# Altium PCB 5th Year Project.PcbDoc
Units mm, origin at the board's own origin, x right, y up, seen from the top; angles counter-clockwise.
Board outline 69.4 x 66.55 mm, 2 copper layers (Top Layer, Bottom Layer), stack 0.273 mm thick; 40 components, 34 nets, 233 pads, 70 vias.
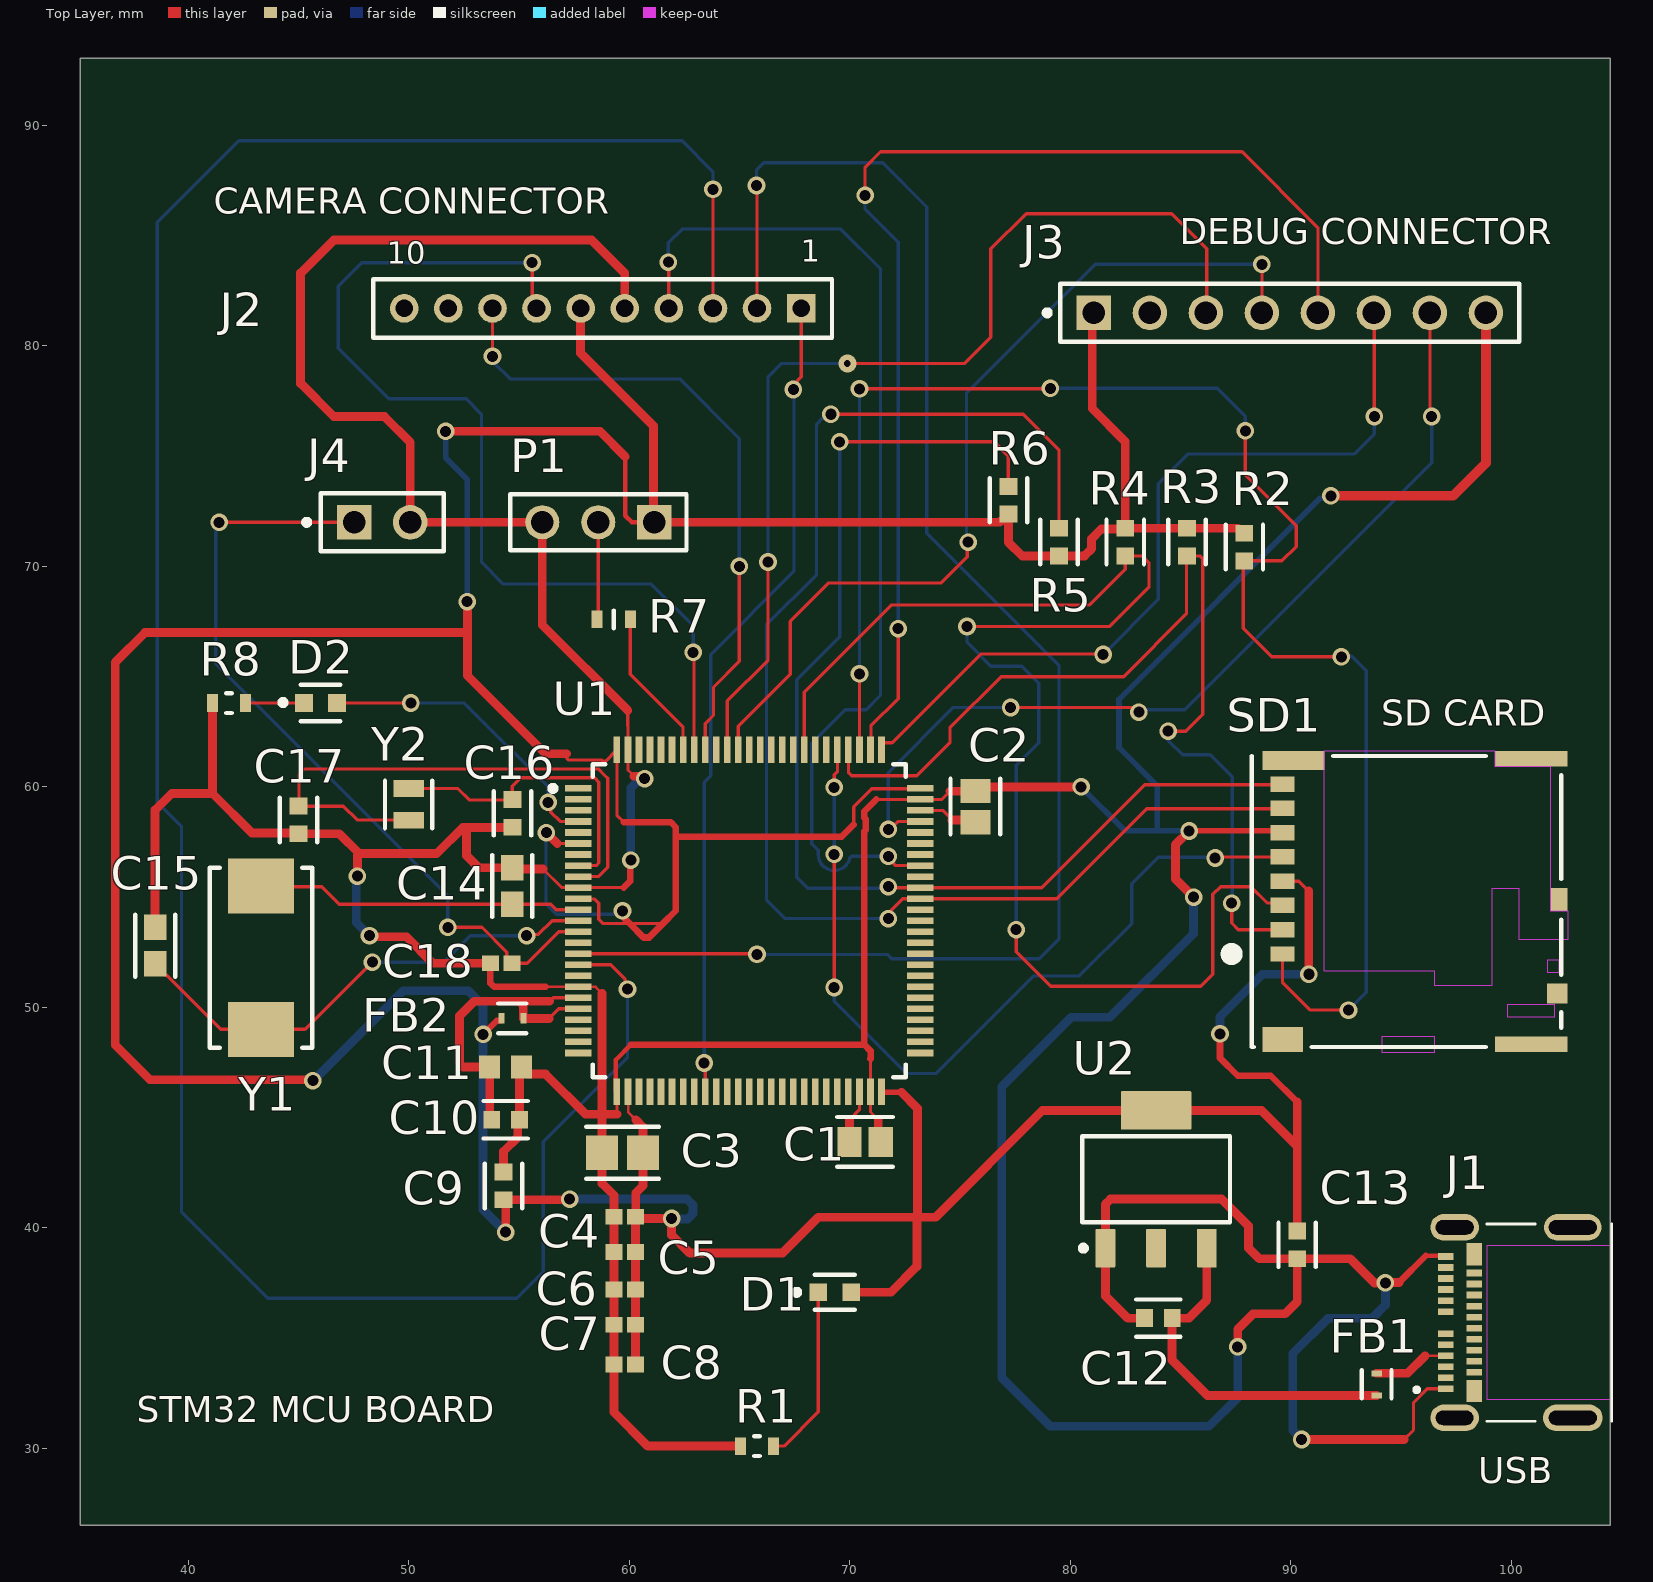
[diagram p0: Top Layer view]
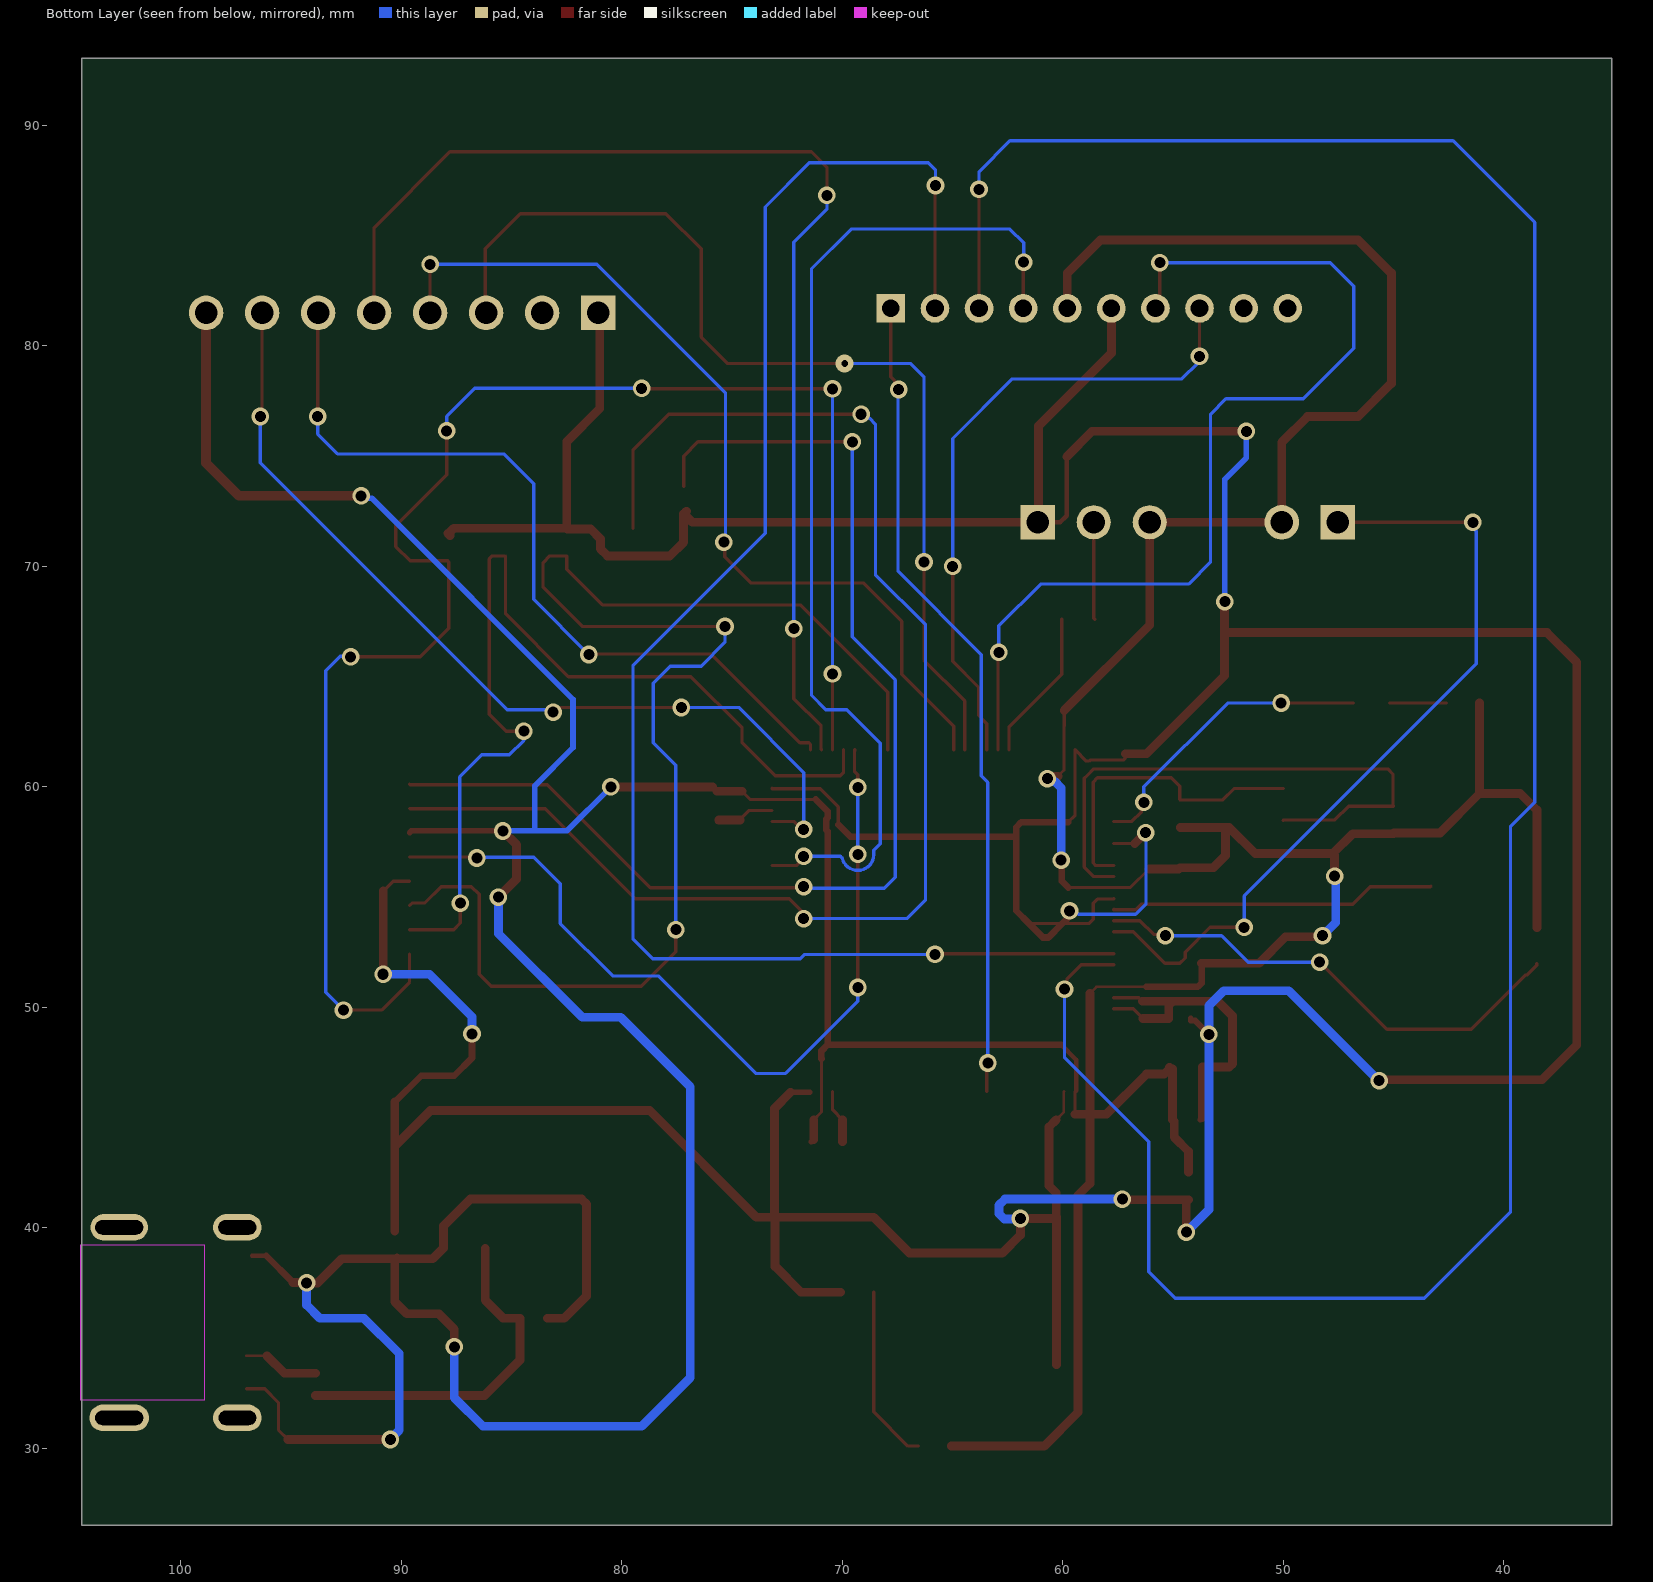
[diagram p1: Bottom Layer view, seen from below]
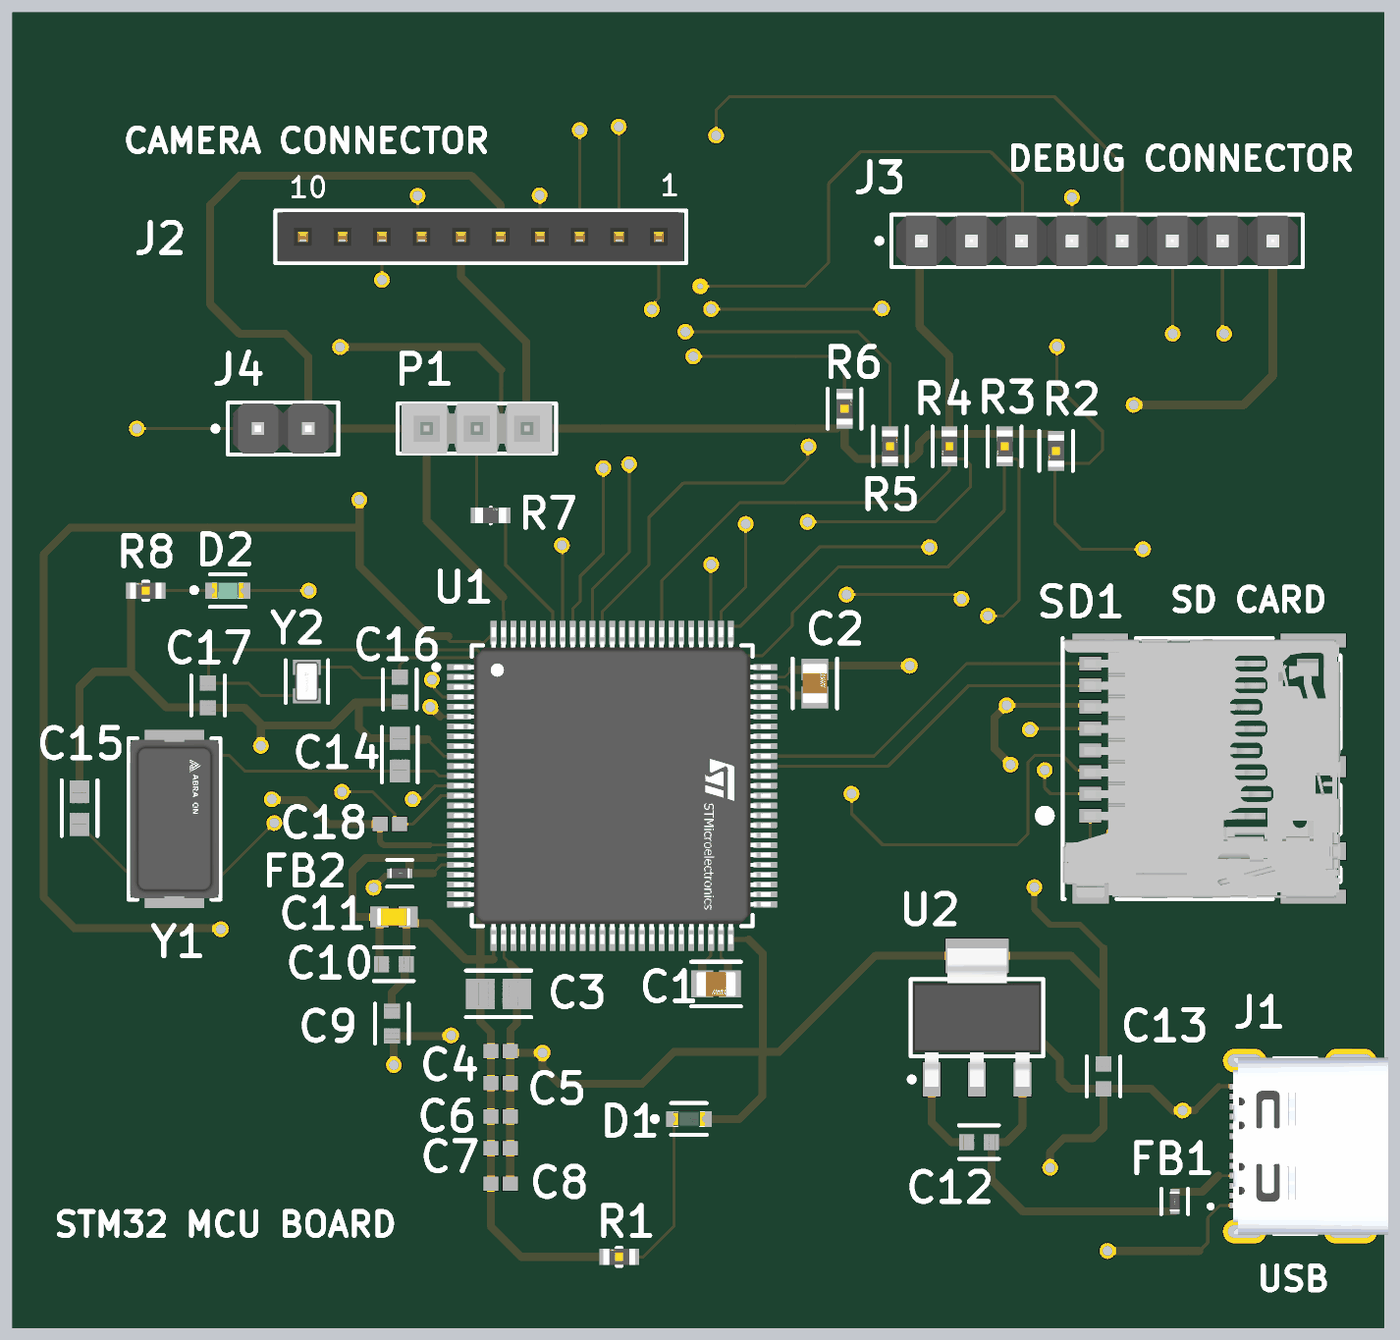
[diagram p2: 3D render of the assembled board from above, using the file's embedded part models]

## Layer stack, top to bottom
Top Solder: solder mask 0.0254, SM-001, Dk 4
Top Layer: signal copper 0.035
Dielectric 1: core 0.2032, Core-024, Dk 4.6
Bottom Layer: signal copper 0.035
Bottom Solder: solder mask 0.0254, SM-001, Dk 4

## Board outline
35.1,26.5 104.5,26.5 104.5,93.05 35.1,93.05

## Design rules (kind name [scope] priority, off if disabled: settings)
Clearance [All] p1: gap=0.254 ignorepadtopadclearanceinfootprint=FALSE except(0: Arc-Hole Track-Hole SMDPad-Hole THPad-Hole Via-Hole Fill-Hole Poly-Hole Region-Hole Text-Hole; 0.127: SMDPad-SMDPad; 0.33: Arc-THPad Track-THPad; 0.5: THPad-THPad)
HoleSize [All] p1: absolutevalues=TRUE maxlimit=6.3 minlimit=0.2 maxpercent=80.000 minpercent=20.000
HoleToHoleClearance [All] p1: gap=0.5 allowstackedmicrovias=TRUE
MinimumAnnularRing [All] p1: minimumring=0.13
MinimumSolderMaskSliver [All] p1: minsoldermaskwidth=0.2
PolygonConnect [All] p1: connectstyle=Relief reliefconductorwidth=0.254 reliefentries=4 polygonreliefangle="90 Angle" airgapwidth=0.254
RoutingVias [All] p1: holewidth=0.5 width=1 viastyle="Through Hole" minholewidth=0.3 minwidth=0.5 maxholewidth=2 maxwidth=3
SilkToSolderMaskClearance [IsPad] p1: minsilkscreentomaskgap=0.2 clearancetoexposedcopper=TRUE
SolderMaskExpansion [All] p1: expansion=0.05 istentingtop=FALSE
Width [All] p1: maxlimit=0.5 minlimit=0.127 preferedwidth=0.3
26 further rules are at their usual default settings.

## Classes and differential pairs
component class "OTHER PARTS": J2 J3 J4 P1 R2 R3 R4 R5 R6 R7 SD1
component class MCU: C1 C2 C3 C4 C5 C6 C7 C8 C9 C10 C11 C12 C13 C14 C15 C16 C17 C18 D1 D2 FB1 FB2 J1 R1 R8 U1 U2 Y1 Y2

## Components (designator, comment, footprint, x,y, rotation, side; value= is the part's Value field where it differs from the comment)
C1 "2.2uF" FP-0805-L_2_01_0_2-W_1_25-IPC_C 70.7,43.9 r0 top
C2 "2.2uF" FP-0805-L_2_01_0_2-W_1_25-IPC_C 75.7,59.106 r90 top
C3 "4.7uF" FP-CL21-IPC_A 59.7,43.4 r180 top
C4 "100nF" CAPC1050X55X23ML05T13 59.8,40.5 r0 top
C5 "100nF" CAPC1050X55X23ML05T13 59.8,38.9 r0 top
C6 "100nF" CAPC1050X55X23ML05T13 59.8,37.2 r0 top
C7 "100nF" CAPC1050X55X23ML05T13 59.8,35.6 r0 top
C8 "100nF" CAPC1050X55X23ML05T13 59.8,33.8 r0 top
C9 "1uF" FP-CL10-IPC_C 54.3,41.9 r90 top
C10 "1uF" FP-CL10-IPC_C 54.4,44.9 r0 top
C11 "10nF" CAPC1608X90X35ML10T15 54.4,47.3 r180 top
C12 "1uF" FP-CL10-IPC_C 84,35.9 r180 top
C13 "1uF" FP-CL10-IPC_C 90.3,39.227 r270 top
C14 "18pF" FP-CL10-IPC_A 54.7,55.502 r90 top
C15 "18pF" FP-CL10-IPC_A 38.5,52.8 r90 top
C16 "4.7pF" FP-CL10-IPC_C 54.7,58.8 r270 top
C17 "4.7pF" FP-CL10-IPC_C 45,58.5 r270 top
C18 "100nF" CAPC1050X55X23ML05T13 54.2,52 r0 top
D1 "PWRON" FP-6_541-5092_01-4-MFG 69.325,37.075 r0 top
D2 "Debug LED" FP-6_541-5094_01-4-MFG 46,63.8 r0 top
FB1 "MMZ1005D121CTD25" FP-MMZ1005-IPC_C 93.9,32.9 r90 top
FB2 "MMZ1005D121CTD25" FP-MMZ1005-IPC_C 54.7,49.5 r0 top
J1 "105450-0101" MOLEX_105450-0101 100.8,35.7 r90 top
J2 "62001011821" 62001011821 58.8,81.7 r180 top
J3 "M20-9990846" FP-M20-9990846-MFG 89.97,81.5 r0 top
J4 "M20-9990246" FP-M20-9990246-MFG 48.8,72 r0 top
P1 "TSW-103-07-T-S" SMTC-TSW-103-07-X-S 61.14,72 r180 top
R1 "330R" FP-KTR03-MFG 65.8,30.1 r180 top
R2 "47k" FP-KTR03-IPC_C 87.9,70.873 r270 top
R3 "47k" FP-KTR03-IPC_C 85.3,71.1 r270 top
R4 "47k" FP-KTR03-IPC_C 82.5,71.1 r270 top
R5 "47k" FP-KTR03-IPC_C 79.5,71.1 r90 top
R6 "47k" FP-KTR03-IPC_C 77.2,73 r90 top
R7 "10k" FP-SFR03-MFG 59.3,67.6 r0 top
R8 "330R" FP-KTR03-MFG 41.85,63.8 r180 top
SD1 "503398-1892" MOLX-503398-1892_V 95.9,54.8 r90 top
U1 "STM32H743VIT6" FP-LQFP100-1L-MFG 65.445,53.93 r0 top
U2 "TLV1117LV33DCYR" DCY0004A_N 83.9,42.2 r90 top
Y1 "ABM2-25.000MHZ-D4Y-T" FP-ABM2-MFG 43.3,52.25 r270 top
Y2 "ABS06-107-32.768KHZ-T" FP-ABS06-MFG 50,59.2 r270 top

## Footprints (in the part's own frame and the unit in brackets; to place one, negate y for a bottom-side part, rotate by r counter-clockwise, add the part's x,y. Pads: shape width x height; smd on the part's side, far side on the other; paste and mask are expansions set on the pad)
62001011821 [mm] "Socket Header, Pitch 2.00 mm, THT, Vertical, single row, 10p"
  rect 1.3x1.3 hole 0.8: 1(-9,0)
  round 1.3 hole 0.8: 2(-7,0) 3(-5,0) 4(-3,0) 5(-1,0) 6(1,0) 7(3,0) 8(5,0) 9(7,0) 10(9,0)
  silkscreen extent -10.4,-1.33 10.4,1.33, body extent -10.25,-1.25 10.25,1.25, height 4.35
CAPC1050X55X23ML05T13 [mm] "Chip Capacitor, 2-Leads, Body 1.05x0.55mm, IPC Low Density"
  rect 0.76x0.72 smd: 1(-0.49,0) 2(0.49,0)
  body extent -0.53,-0.28 0.53,0.27, height 0.55
CAPC1608X90X35ML10T15 [mm] "Chip Capacitor, 2-Leads, Body 1.7x0.9mm, IPC Low Density"
  rect 0.95x1.05 smd: 1(-0.725,0) 2(0.725,0)
  body extent -0.85,-0.45 0.85,0.45, height 0.9
DCY0004A_N [mm] "SOT223, 4-Leads, Body 6.7x3.7mm, Pitch 2.3mm, IPC Medium Density"
  rrect11% 1.75x0.9 smd: 1(-3.125,2.3) 2(-3.125,0) 3(-3.125,-2.3)
  rrect6% 1.75x3.2 smd: 4(3.125,0)
  silkscreen extent -3.25,-3.35 1.95,3.42, body extent -3.5,-3.25 3.5,3.25, height 1.62
FP-6_541-5092_01-4-MFG [mm]
  rect 0.8x0.8 smd paste+0 mask+0: 1(-0.75,0) 2(0.75,0)
  silkscreen extent -1.85,-0.8 0.9,0.8, body extent -1.25,-0.6 1.25,0.6, height 0.25
FP-6_541-5094_01-4-MFG [mm]
  rect 0.8x0.8 smd paste+0 mask+0: 1(-0.75,0) 2(0.75,0)
  silkscreen extent -1.82,-0.82 0.9,0.82, body extent -1.25,-0.6 1.25,0.6, height 0.25
FP-0805-L_2_01_0_2-W_1_25-IPC_C [mm]
  rect 1.105x1.356 smd paste+0 mask+0: 1(-0.706,0) 2(0.706,0)
  silkscreen extent -1.26,-1.12 1.26,1.12, body extent -1.36,-0.82 1.36,0.82, height 0.25
FP-ABM2-MFG [mm]
  rect 2.5x3 smd paste+0 mask+0: 1(-3.25,0) 2(3.25,0)
  silkscreen extent -4.08,-2.32 4.08,2.32, body extent -4.6,-2.42 4.6,2.42, height 0.25
FP-ABS06-MFG [mm]
  rect 0.75x1.4 smd paste+0 mask+0: 1(-0.725,0) 2(0.725,0)
  silkscreen extent -1.07,-1.07 1.07,1.07, body extent -1.2,-0.8 1.2,0.8, height 0.25
FP-CL10-IPC_A [mm]
  rect 1.158x1.012 smd paste+0 mask+0: 1(-0.827,0) 2(0.827,0)
  silkscreen extent -1.41,-0.91 1.41,0.91, body extent -1.91,-1.01 1.91,1.01, height 0.25
FP-CL10-IPC_C [mm]
  rect 0.758x0.812 smd paste+0 mask+0: 1(-0.627,0) 2(0.627,0)
  silkscreen extent -1.01,-0.85 1.01,0.85, body extent -1.11,-0.55 1.11,0.55, height 0.25
FP-CL21-IPC_A [mm]
  rect 1.455x1.556 smd paste+0 mask+0: 1(-0.926,0) 2(0.926,0)
  silkscreen extent -1.65,-1.18 1.65,1.18, body extent -2.15,-1.28 2.15,1.28, height 0.25
FP-KTR03-IPC_C [mm]
  rect 0.758x0.812 smd paste+0 mask+0: 1(-0.627,0) 2(0.627,0)
  silkscreen extent -1.01,-0.85 1.01,0.85, body extent -1.11,-0.55 1.11,0.55, height 0.25
FP-KTR03-MFG [mm]
  rect 0.5x0.8 smd paste+0 mask+0: 1(-0.75,0) 2(0.75,0)
  silkscreen extent -0.13,-0.45 0.13,0.45, body extent -1.1,-0.55 1.1,0.55, height 0.25
FP-LQFP100-1L-MFG [mm]
  rect 1.2x0.3 smd paste+0 mask+0: 1(-7.75,6) 2(-7.75,5.5) 3(-7.75,5) 4(-7.75,4.5) 5(-7.75,4) 6(-7.75,3.5) 7(-7.75,3) 8(-7.75,2.5) 9(-7.75,2) 10(-7.75,1.5) 11(-7.75,1) 12(-7.75,0.5) 13(-7.75,0) 14(-7.75,-0.5) 15(-7.75,-1) 16(-7.75,-1.5) 17(-7.75,-2) 18(-7.75,-2.5) 19(-7.75,-3) 20(-7.75,-3.5) 21(-7.75,-4) 22(-7.75,-4.5) 23(-7.75,-5) 24(-7.75,-5.5) 25(-7.75,-6) 51(7.75,-6) 52(7.75,-5.5) 53(7.75,-5) 54(7.75,-4.5) 55(7.75,-4) 56(7.75,-3.5) 57(7.75,-3) 58(7.75,-2.5) 59(7.75,-2) 60(7.75,-1.5) 61(7.75,-1) 62(7.75,-0.5) 63(7.75,0) 64(7.75,0.5) 65(7.75,1) 66(7.75,1.5) 67(7.75,2) 68(7.75,2.5) 69(7.75,3) 70(7.75,3.5) 71(7.75,4) 72(7.75,4.5) 73(7.75,5) 74(7.75,5.5) 75(7.75,6)
  rect 0.3x1.2 smd paste+0 mask+0: 26(-6,-7.75) 27(-5.5,-7.75) 28(-5,-7.75) 29(-4.5,-7.75) 30(-4,-7.75) 31(-3.5,-7.75) 32(-3,-7.75) 33(-2.5,-7.75) 34(-2,-7.75) 35(-1.5,-7.75) 36(-1,-7.75) 37(-0.5,-7.75) 38(0,-7.75) 39(0.5,-7.75) 40(1,-7.75) 41(1.5,-7.75) 42(2,-7.75) 43(2.5,-7.75) 44(3,-7.75) 45(3.5,-7.75) 46(4,-7.75) 47(4.5,-7.75) 48(5,-7.75) 49(5.5,-7.75) 50(6,-7.75) 76(6,7.75) 77(5.5,7.75) 78(5,7.75) 79(4.5,7.75) 80(4,7.75) 81(3.5,7.75) 82(3,7.75) 83(2.5,7.75) 84(2,7.75) 85(1.5,7.75) 86(1,7.75) 87(0.5,7.75) 88(0,7.75) 89(-0.5,7.75) 90(-1,7.75) 91(-1.5,7.75) 92(-2,7.75) 93(-2.5,7.75) 94(-3,7.75) 95(-3.5,7.75) 96(-4,7.75) 97(-4.5,7.75) 98(-5,7.75) 99(-5.5,7.75) 100(-6,7.75)
  silkscreen extent -9.02,-7.1 7.1,7.1, body extent -8.45,-8.45 8.45,8.45, height 0.25
FP-M20-9990246-MFG [mm]
  rect 1.57x1.57 hole 1.02 paste-1000 mask+0: 1(-1.27,0)
  round 1.57 hole 1.02 paste-1000 mask+0: 2(1.27,0)
  silkscreen extent -3.55,-1.32 2.79,1.32, body extent -2.89,-1.42 2.89,1.42, height 0.25
FP-M20-9990846-MFG [mm]
  rect 1.57x1.57 hole 1.02 paste-1000 mask+0: 1(-8.89,0)
  round 1.57 hole 1.02 paste-1000 mask+0: 2(-6.35,0) 3(-3.81,0) 4(-1.27,0) 5(1.27,0) 6(3.81,0) 7(6.35,0) 8(8.89,0)
  silkscreen extent -11.13,-1.32 10.41,1.32, body extent -10.51,-1.42 10.51,1.42, height 0.25
FP-MMZ1005-IPC_C [mm]
  rect 0.272x0.472 smd paste+0 mask+0: 1(-0.5,0) 2(0.5,0)
  silkscreen extent -0.64,-0.67 0.64,0.67, body extent -0.74,-0.38 0.74,0.38, height 0.25
FP-SFR03-MFG [mm]
  rect 0.5x0.8 smd paste+0 mask+0: 1(-0.75,0) 2(0.75,0)
  silkscreen extent 0,-0.4 0,0.4, body extent -1.1,-0.55 1.1,0.55, height 0.25
MOLEX_105450-0101 [mm]
  rect 0.3x0.7 smd: A1(-3,3.77) A2(-2.5,3.77) A3(-2,3.77) A4(-1.5,3.77) A5(-1,3.77) A6(-0.5,3.77) A7(0.5,3.77) A8(1,3.77) A9(1.5,3.77) A10(2,3.77) A11(2.5,3.77) A12(3,3.77) B2(2.25,2.47) B3(1.75,2.47) B4(1.25,2.47) B5(0.75,2.47) B6(0.25,2.47) B7(-0.25,2.47) B8(-0.75,2.47) B9(-1.25,2.47) B10(-1.75,2.47) B11(-2.25,2.47)
  rect 1x0.7 smd: B1(3.1,2.47) B12(-3.1,2.47)
  oval 1.2x2.2 hole 0.65 slot 1.7 at 90 deg: S1(-4.32,3.36)
  oval 1.2x2.2 hole 0.65 slot 1.725 at 90 deg: S2(4.32,3.36)
  oval 1.2x2.7 hole 0.65 slot 2.175 at 90 deg: S3(-4.32,-2)
  oval 1.2x2.6 hole 0.65 slot 2.175 at 90 deg: S4(4.32,-2)
  Keep-Out Layer region: 3.5,-3.77 -3.5,-3.77 -3.5,1.88 3.5,1.88
  silkscreen extent -4.47,-3.77 4.47,5.18, body extent -4.47,-3.91 4.47,4, height 3.2
MOLX-503398-1892_V [mm] "CONN, 8-Leads, Body 14.05x13.2mm, Pitch 1.1mm"
  rect 0.7x1.1 smd: 1(-2.38,6.27) 2(-1.28,6.27) 3(-0.18,6.27) 4(0.92,6.27) 5(2.02,6.27) 6(3.12,6.27) 7(4.22,6.27) 8(5.32,6.27)
  rect 1.05x0.78 smd: 9(0.095,-6.27)
  rect 0.9x0.93 smd: 10(-4.17,-6.195)
  rect 0.86x2.8 smd: 11(6.4,5.77)
  rect 0.7x3.3 smd: 12(6.48,-5.01) 13(-6.48,-5.01)
  rect 1.14x1.83 smd: 14(-6.26,6.255)
  Top Layer keep-out region: -6.83,-0.63 -6.13,-0.63 -6.13,1.77 -6.83,1.77
  Top Layer keep-out region: -5.235,-6.08 -4.685,-6.08 -4.685,-3.93 -5.235,-3.93
  Top Layer keep-out region: -3.22,-6.28 -2.67,-6.28 -2.67,-5.73 -3.22,-5.73
  Top Layer keep-out region: 6.83,4.37 6.83,-3.36 6.13,-3.36 6.13,-5.88 -0.43,-5.88 -0.43,-6.66 -1.73,-6.66 -1.73,-4.48 0.57,-4.48 0.57,-3.23 -3.82,-3.23 -3.82,-0.63 -3.17,-0.63 -3.17,4.37
  silkscreen extent -6.6,-6.38 6.6,8.82, body extent -6.55,-6.38 6.55,7.67, height 1.28
SMTC-TSW-103-07-X-S [mm] ".025 SQ Post Terminal Strip Assembly, 1x3 Pins, Vertical, 2.54mm Pitch, Male"
  rect 1.55x1.55 hole 1.02: 1(0,0)
  round 1.55 hole 1.02: 2(2.54,0) 3(5.08,0)
  silkscreen extent -1.46,-1.27 6.54,1.27, body extent -1.27,-1.27 6.35,1.27, height 8.38

## Part data
C1 C2: library part CMP-2007-04247-2, "General Purpose Ceramic Capacitor, 0805, 2.2uF, 10%, X5R, 15%, 25V", Case Code (Imperial)=0805, Case Code (Metric)=2012, Dielectric=X5R, Max Operating Temperature=85°C, Min Operating Temperature=-55°C, Package Quantity=1, Tolerance=10%, Voltage Rating=25V, Capacitance=2.2uF, Case/Package=0805, Construction=Flat, Contact Plating=Tin, Depth=1.25mm, Height=1.4mm, Lead Free="Lead Free", Length=2.01mm, Mount="Surface Mount", Number of Pins=2, Packaging="Tape and Reel", Radiation Hardening=No, RoHS Compliant=Yes, Series=-, Termination=SMD/SMT, Thickness=0.037inch, Voltage Rating (DC)=25V, Width=1.25mm
C3: library part CMP-13271-002624-1, "CL21 Series 0805 4.7uF 25V ±10% Tolerance X5R Multilayer Ceramic Chip Capacitor", Case Code (Imperial)=0805, Case Code (Metric)=2012, Dielectric=X5R, Max Operating Temperature=85°C, Min Operating Temperature=-55°C, Package Quantity=1, Tolerance=10%, Voltage Rating=25V, Capacitance=4.7uF, Case/Package=0805, Depth=1.25mm, Height=1.25mm, Lead Free="Lead Free", Length=2mm, Mount="Surface Mount", Packaging="Tape and Reel", Radiation Hardening=No, Thickness=0.055inch, Voltage Rating (DC)=25V, Width=0.049inch
C4 C5 C6 C7 C8 C18: library part CMP-2000-05439-1, "Chip Capacitor, 100 nF, +/- 10%, 16 V, -55 to 125 degC, 0402 (1005 Metric), RoHS, Tape and Reel", Capacitance=100000pF, Case Size/Dimension=0402, Dielectric=X7R, Manufacturer="Samsung Electro-Mechanics", Rated Voltage=16V, Tolerance (%)=±10%, Datasheet URL=https://datasheet.ciiva.com/29198/458718-da-01-en-vs-kondensator-0402-29198423.pdf, Datasheet Version=Nov-10, Manufacturer URL=http://www.samsungsem.com/global/index.jsp
C9 C10 C12 C13: library part CMP-13271-004127-1, "Cap Ceramic 1uF 25V X5R ±10% Pad SMD 0603 +85°C T/R", Case Code (Imperial)=0603, Case Code (Metric)=1608, Dielectric=X5R, Max Operating Temperature=85°C, Min Operating Temperature=-55°C, Package Quantity=1, Tolerance=10%, Voltage=25V, Capacitance=1uF, Case/Package=0603, Contact Plating=Tin, Depth=0.8mm, Height=0.8mm, Lead Free="Lead Free", Length=1.6mm, Material=Ceramic, Mount="Surface Mount", Packaging="Tape and Reel", Radiation Hardening=No, Thickness=0.035inch, Voltage Rating=25V, Voltage Rating (DC)=25V, Width=0.031inch
C11: library part CMP-2100-03642-1, "Chip Capacitor, 10 nF, +/- 10%, 50 V, -55 to 125 degC, 0603 (1608 Metric), RoHS, Tape and Reel", Case Code (Imperial)=0603, Case Code (Metric)=1608, Dielectric=X7R, Dielectric Material=Ceramic, Insulation Resistance=10GR, Manufacturer=Murata, Max Operating Temperature=125degC, Min Operating Temperature=-55degC, Package Description="2-Pin Surface Mount Device, Body 1.6 x 0.8 mm", Package Quantity=1, Tolerance=10%, Voltage=50V, Capacitance=10nF, Case/Package=0603, Datasheet URL=http://search.murata.co.jp/Ceramy/image/img/A01X/G101/ENG/GRM188R71H103KA01-01.pdf, Datasheet Version=42401.0, Depth=0.8mm, Height=0.8mm, Lead Free=LeadFree, Length=1.6mm, Manufacturer URL=http://www.murata.com/, Material=Ceramic, Mount=SurfaceMount, Number of Pins=2, Package Reference=0603, Packaging=TapeandReel, REACH SVHC=Unknown, RoHSCompliant=True, Termination=SMD/SMT, Thickness=0.035inch, Voltage Rating=50V, Voltage Rating (DC)=50V, Width=0.031inch
C14 C15: library part CMP-2000-06099-2, "Cap Ceramic 18pF 50V C0G ±5% Pad SMD 0603 +125°C T/R", Case Code (Imperial)=0603, Case Code (Metric)=1608, Dielectric=C0G, Max Operating Temperature=125°C, Min Operating Temperature=-55°C, Temperature Coefficient=300ppm/°C, Tolerance=5%, Voltage=50V, Capacitance=18pF, Case/Package=0603, Contact Plating=Tin, Depth=0.8mm, Height=0.8mm, Length=1.6mm, Material=Ceramic, Mount="Surface Mount", Packaging="Tape and Reel", Radiation Hardening=No, Thickness=0.035inch, Voltage Rating=50V, Width=0.031inch
C16 C17: library part CMP-13271-002893-1, "Cap Ceramic 4.7pF 50V C0G ±0.25pF Pad SMD 0603 +125°C T/R", Case Code (Imperial)=0603, Case Code (Metric)=1608, Dielectric=C0G, Max Operating Temperature=125°C, Min Operating Temperature=-55°C, Package Quantity=1, Temperature Coefficient=300ppm/°C, Voltage=50V, Capacitance=4.7pF, Case/Package=0603, Depth=0.8mm, Height=0.8mm, Lead Free="Lead Free", Length=1.6mm, Material=Ceramic, Mount="Surface Mount", Packaging="Tape and Reel", Radiation Hardening=No, Thickness=0.035inch, Voltage Rating=50V, Voltage Rating (DC)=50V, Width=0.031inch
D1: library part CMP-02520-000012-1, "LED RED 0603 SMD", Ambient Temperature Range High=+85°C, Ambient Temperature Range Low=-35°C, Colour=Red, Forward Current=20mA, Forward Voltage=2V, Manufacturer=Vishay, Manufacturer Part Number=VLMS1300-GS08, Package=6.541-5092.01-4, Power Dissipation=75mW, Reverse Voltage=5V, Temperature="-35°C to +85°C", Automotive=No, Category=Diode, ComponentLink2Description=Datasheet, ComponentLink2URL=http://www.vishay.com/docs/82437/vlmo1300.pdf, Device Class L1=Optoelectronics, Device Class L2=LEDs, Device Class L3=unset, Digikey Description="LED RED 0603 SMD", Height=1mm, Lead Free=Yes, Led Orientation="Top View", Luminous Intensity=54mcd, Mouser Description="Standard LEDs - SMD Super Red Clear Non-Diff", Octopart=https://octopart.com/vlms1300-gs08-vishay-21709201, Peak Emmision Wavelength=639nm, RoHS=TRUE, Temperature Range High=+85°C, Temperature Range Low=-35°C, Viewing Angle=130°, Wavelength=631nm
D2: library part CMP-02520-000013-1, "LED BLUE 0603 SMD", Ambient Temperature Range High=+80°C, Ambient Temperature Range Low=-20°C, Colour=Blue, Forward Current=20mA, Forward Voltage=3.8V, Manufacturer="Vishay Semiconductor Opto Division", Manufacturer Part Number=VLMB1300-GS08, Package=6.541-5094.01-4, Power Dissipation=76mW, Temperature="-20°C to +80°C", Automotive=No, Category=Diode, ComponentLink2Description=Datasheet, ComponentLink2URL=http://www.vishay.com/docs/82437/vlmo1300.pdf, Device Class L1=Optoelectronics, Device Class L2=LEDs, Device Class L3=unset, Digikey Description="LED BLUE 0603 SMD", Height=1mm, Lead Free=Yes, Led Orientation="Top View", Luminous Intensity=28-180mcd, Mouser Description="LED; SMD; 0603; blue; 28-180mcd; 1.6x0.8x0.8mm; 130°; 2.8÷3.8V; 20mA", Octopart=https://octopart.com/vlmb1300-gs08-vishay-22022408, Peak Emmision Wavelength=468nm, RoHS=TRUE, Temperature Range High=+80°C, Temperature Range Low=-20°C, Viewing Angle=130°, Wavelength=475nm
FB1 FB2: library part CMP-08257-000320-1, "Signal Line Ferrite Bead 120Ω @ 100MHz 350mA DCR 600mΩ AEC-Q200 SMD 0402", Case Code (Imperial)=0402, Case Code (Metric)=1005, Current Rating=350mA, DC Resistance (DCR)=600mR, Max Operating Temperature=125°C, Min Operating Temperature=-55°C, Package Quantity=10000, Ratings=AEC-Q200, Case/Package=0402, DC Resistance-Max=600mR, Height=0.022inch, Impedance=120R, Lead Free="Lead Free", Length=0.039inch, Max Current Rating=350mA, Mount="Surface Mount", Number of Lines=1, Packaging="Tape and Reel", RoHS Compliant=Yes, Series=MMZ, Width=0.02inch
J1: "USB-C (USB TYPE-C) USB 3.2 Gen 2 (USB 3.1 Gen 2, Superspeed + (USB 3.1)) Receptacle Connector 24 Position Surface Mount, Right Angle; Through Hole", Package=None, Supplier Part Number 1=WM12856CT-ND, Check_prices=https://www.snapeda.com/parts/1054500101/Molex/view-part/?ref=eda, Digi-Key_Part_Number=WM12856TR-ND, MF=Molex, MP=1054500101, Purchase-URL=https://pricing.snapeda.com/search/part/1054500101/?ref=eda, SnapEDA_Link=https://www.snapeda.com/parts/1054500101/Molex/view-part/?ref=snap, Supplier 1=Digi-Key, Supplier 2=LCSC, Supplier Part Number 2=C919444
J2: library part CMP-1502-01210-1, "THT Vertical Socket Header WR-PHD, Pitch 2.00 mm, Single Row, 10 pins", Contact Resistance=20mOhm, Manufacturer="Wurth Elektronik", Operating Temperature=-40to105degC, Rated Current=2A, Withstanding Voltage=500VAC, Working Voltage=250VAC, Datasheet URL=https://katalog.we-online.de/em/datasheet/62001011821.pdf, Gender=Female, Manufacturer URL=http://www.we-online.de, Mounting Technology=THT, Orientation=Vertical, Package Reference=62001011821, Packaging=Tube, Part Number=62001011821, Pin Number=10, Pitch=2.00mm, Publisher=WurthElektronik, Row Number=Single
J3: library part CMP-15831-000033-1, "CONN HEADER VERT 8POS 2.54MM", Case/Package=SIL, Color=Black, Contact Resistance=30mR, Current Rating=3A, Insulation Resistance=1GR, Max Operating Temperature=105°C, Min Operating Temperature=-40°C, Package Quantity=1000, Connector Type="Male Pin", Contact Material=Brass, Contact Mating Length=0.24inch, Contact Plating=Tin, Contact Type="Male Pin", Depth=2.54mm, Gender=Male, Housing Color=Black, Housing Material=Nylon, Length=20.32mm, Max Current Rating=3A, Mount="Through Hole", Number Of Contacts=8, Number of Positions=8, Number of Rows=1, Orientation=Straight, Packaging=Bulk, Pitch=2.54mm, Radiation Hardening=No, REACH SVHC="No SVHC", RoHS Compliant=Yes, Series=M20, Termination=Solder
J4: library part CMP-15831-000009-1, "CONN HEADER VERT 2POS 2.54MM", Current Rating=3A, Manufacturer=Harwin, Temperature="-40°C to +105°C", Temperature Range High=+105°C, Temperature Range Low=-40°C, Automotive=No, Category=Conn, ComponentLink2Description=Datasheet, ComponentLink2URL=https://cdn.harwin.com/pdfs/M20-999.pdf, Conn Gender=Male, Conn Orientation=Vertical, Contact Material=Tin,Nickel, Device Class L1=Connectors, Device Class L2="Headers and Wire Housings", Device Class L3=unset, Digikey Description="CONN HEADER VERT 2POS 2.54MM", Height=8.99mm, Lead Free=Yes, Manufacturer Part Number=M20-9990246, Mouser Description="2.54mm (0.1\") Pitch SIL Vertical PC Tail Pin Header, 6.1mm mating pin height, tin, 2 contacts", Number Of Contacts=2, Number of Rows=1, Octopart=https://octopart.com/m20-9990246-harwin-2590635, Package=M20-9990246, Pitch=2.54mm, RoHS=TRUE
P1: library part CMP-1024-00332-1, "0.025\" SQ Post Header, Through-hole, Vertical, -55 to 105 degC, 2.54 mm Pitch, 3-Pin, Male, RoHS", Manufacturer=Samtec, Temperature Range="-55 to 105 degC", ComponentLink1Description="Manufacturer URL", ComponentLink1URL=http://www.samtec.com, ComponentLink2Description=Datasheet, ComponentLink2URL=http://www.samtec.com/documents/webfiles/pdf/TSW_TH.PDF, ComponentLink3Description="Package Specification", ComponentLink3URL=http://www.samtec.com/documents/webfiles/cpdf/TSW-XXX-XX-XXX-X-XX-XXX-MKT.pdf, DatasheetVersion=F-214, Mounting Technology=Through-hole, Orientation=Vertical, PackageDescription=".025[0.64] SQ. Post Terminal Strip Assembly", PackageReference=TSW-103-07-X-S, PackageVersion="DM, 8/1988", PartNumber=TSW-103-07-T-S, Pitch="2.54 mm", RoHS=True
R1 R8: library part CMP-08839-007468-1, "Res Thick Film 0603 330Ω 1% 0.1W ±100ppm/°C Automotive Paper T/R", Case Code (Imperial)=0603, Case Code (Metric)=1608, Max Operating Temperature=155°C, Max Power Dissipation=100mW, Min Operating Temperature=-55°C, Package Quantity=5000, Resistor Type="Thick Film", Temperature Coefficient=100ppm/°C, Tolerance=1%, Case/Package=0603, Features="Automotive AEC-Q200", Height=0.022inch, Length=0.063inch, Number of Terminations=2, Packaging="Cut Tape", Resistance=330R, RoHS Compliant=Yes, Series=KTR, Width=0.031inch
R2 R3 R4 R5 R6: library part CMP-08839-030818-1, "Res Thick Film 0603 47kΩ 1% 0.1W ±100ppm/°C Automotive Paper T/R", Case Code (Imperial)=0603, Case Code (Metric)=1608, Max Operating Temperature=155°C, Max Power Dissipation=100mW, Min Operating Temperature=-55°C, Package Quantity=1, Resistance=47kR, Resistor Type="Thick Film", Temperature Coefficient=100ppm/°C, Tolerance=1%, Case/Package=0603, Features="Automotive AEC-Q200", Height=0.022inch, Length=0.063inch, Number of Terminations=2, Packaging="Tape and Reel", Series=KTR, Width=0.031inch
R7: library part CMP-08839-031887-1, "RES SMD 10K OHM 1% 1/10W 0603", RoHS Compliant=Yes
SD1: library part CMP-2000-05621-1, "Micro SD Connector, Pitch 1.1 mm, 8 Position, Height 1.4 mm, -25 to 85 degC, RoHS, Tape and Reel", Current Rating=500mA, Manufacturer=Molex, Package Description="Micro SD Connector, Pitch 1.1 mm, 8 Position, Height 1.4 mm", Voltage Rating=10VAC/DC, Brand=Molex, Datasheet URL=http://www.molex.com/pdm_docs/sd/5033981892_sd.pdf, Datasheet Version="Rev. E, 04/2006", Factory Pack Quantity=2400, Manufacturer URL=http://www.molex.com/, Mounting Technology=SurfaceMount, Package Reference=503398-1892, Packaging=Reel, Product Category=MemoryCardConnectors, RoHS=Details, Series=503398
U1: library part CMP-12105-000050-1, "IC MCU 32BIT 2MB FLASH 100LQFP", Ambient Temperature Range High=+85°C, Ambient Temperature Range Low=-40°C, Case Code (Imperial)=0201, Case Code (Metric)=0603, Frequency=480MHz, Manufacturer=STMicroelectronics, Max Junction Temp=+125°C, Max Supply Voltage=3.6V, Min Supply Voltage=1.71V, Package=LQFP100-1L, Package Quantity=15000, Supplier Part Number 1=81-GJM0335C1E7R0BB1D, Temperature="-40°C to +125°C", Automotive=No, Case/Package=0201, Category=IC, ComponentLink1Description=http://www.mouser.com/ds/2/281/c02e-2905.pdf?src-supplier=Mouser, ComponentLink1URL=http://www.mouser.com/ds/2/281/c02e-2905.pdf?src-supplier=Mouser, ComponentLink2Description=Datasheet, ComponentLink2URL=https://www.st.com/resource/en/datasheet/stm32h743vi.pdf, Core Architecture="Arm Cortex-M7", Data Bus Width=32bits, Device Class L1="Integrated Circuits (ICs)", Device Class L2="Embedded Processors and Controllers", Device Class L3=Microcontrollers, Digikey Description="IC MCU 32BIT 2MB FLASH 100LQFP", Height=1.6mm, Interface=I2C,SPI,UART,USART,USB,LIN,IrDA,Ethernet,I2S,Other, Ipc Land Pattern Name=QFP50P1600X1600X160-100, Lead Free=Yes, Manufacturer Part Number=STM32H743VIT6, Memory Size=2MBytes, Memory Type=FLASH, Number Of A/D Converters=3, Number Of Adc Channels=36, Number Of Cores=1, Number Of Ethernet Channels=1, Number Of I2C Channels=4, Number Of I/Os=82, Number Of Pwm Channels=42, Number Of Spi Channels=6, Number Of Timers/Counters=20, Number Of Uart Channels=9, Number Of Usb Channels=2, Octopart=https://octopart.com/stm32h743vit6-stmicroelectronics-76372527, Packaging="Tape and Reel", Pricing 1="1=0.10000, 10=0.06000, 50=0.06000, 100=0.02800, 1000=0.01600, 10000=0.01300 (USD)", Ram Size=1060KBytes, RoHS=TRUE, RoHS Compliant=Yes, Standoff Height=0.05mm, Stock 1=14850, Supplier 1=Mouser, Temperature Range High=+125°C, Temperature Range Low=-40°C, Weight=1.2E-05oz
U2: library part CMP-0395-00503-2, "Single Output LDO, 1 A, Fixed 3.3 V Output, 2 to 5.5 V Input, 4-pin SOT-223 (DCY), -40 to 125 degC, Green (RoHS & no Sb/Br)", Manufacturer="Texas Instruments", Accuracy(%)=2, Code_JEDEC=TO-261, ComponentLink1Description="Manufacturer URL", ComponentLink1URL=http://www.ti.com/, ComponentLink2Description=Datasheet, ComponentLink2URL=http://www.ti.com/general/docs/lit/getliterature.tsp?genericPartNumber=TLV1117LV33&fileType=pdf, ComponentLink3Description="Package Specification", ComponentLink3URL=http://www.ti.com/litv/pdf/mpds094a, DatasheetVersion=SBVS160A, Eco-Plan="Green (RoHS & no Sb/Br)", Fixed Output Options(V)=3.3, Iout(Max)(A)=1, Iq(Typ)(mA)=0.05, Mounting Technology="Surface Mount", PackageDescription="4-Pin Plastic Small Outline, Body 3.5 x 6.5 mm, Pitch 2.3 mm", PackageReference=DCY0004A, PackageVersion=4202506/B, PartNumber=TLV1117LV33DCYR, SubFamily="Single Channel LDO", Vdo(Typ)(mV)=1200, Vin(Max)(V)=5.5, Vin(Min)(V)=2, Vout Adj(Max)(V)=3.3, Vout Adj(Min)(V)=3.3
Y1: library part CMP-27762-013592-1, "Crystal 25MHz ±30ppm 18pF SMD-2 8mm x 4.5mm", Case/Package=CSMD, ESR (Equivalent Series Resistance)=50R, Frequency=25MHz, Frequency Stability=30ppm, Load Capacitance=18pF, Max Operating Temperature=85°C, Min Operating Temperature=-40°C, Package Quantity=1000, Resistor Type=Ceramic, Depth=4.5mm, Frequency Tolerance=30ppm, Height=0.063inch, Length=8mm, Mount="Surface Mount", Number of Pins=2, Packaging="Tape and Reel", RoHS Compliant=Yes, Series=ABM2, Series Resistance=50R, Termination=SMD/SMT, Tolerance=30ppm, Width=0.177inch
Y2: library part CMP-2000-05734-3, "Crystal 32.768kHz ±20ppm (Tol) 4pF FUND 60kΩ 2-Pin Mini-CSMD T/R", Case Code (Imperial)=0805, Case Code (Metric)=2012, Case/Package=SMD/SMT, ESR (Equivalent Series Resistance)=60kR, Frequency=32.768kHz, Frequency Stability=175ppm, Frequency Tolerance=20ppm, Load Capacitance=4pF, Max Operating Temperature=85°C, Min Operating Temperature=-40°C, Package Quantity=3000, Series Resistance=80kR, Height=0.6mm, Lead Free="Lead Free", Length=2mm, Mount="Surface Mount", Number of Pins=2, Packaging="Tape and Reel", Radiation Hardening=No, RoHS Compliant=Yes, Series=ABS06, Termination=SMD/SMT, Tolerance=20ppm, Width=1.2mm

## Via types
v1: diameter 0.8, hole 0.5, Top Layer to Bottom Layer, 69 vias
v2: diameter 0.8, hole 0.3, Top Layer to Bottom Layer, 1 vias

## Nets (pads, with @x,y where several pads share a name; then routed paths per layer and width w, separated by ;. In a path a pad name is that pad's centre, name@x,y a point inside that pad or via, vN(x,y) a via of type N, cw(c..) or ccw(c..) an arc to the next point about the centre after c; other vN are vias at no path point)
+3V3: C3.1 C4.2 C5.2 C6.2 C7.2 C8.2 C9.1 C13.1 D1.2 FB2.1 J2.6 J3.1 P1.1 R2.1 R3.1 R4.1 R5.1 R6.1 SD1.4 U1.6 U1.11 U1.27 U1.50 U1.75 U1.100 U2.4 | length 283
  Top Layer w0.127: U1.27 59.958,46.167 59.958,45.464 59.962,45.459 59.962,45.237 60.3,44.9
  Top Layer w0.15: 56.738,57.43 U1.6 ; 57.161,61.504 57.161,61.305 57.249,61.217 58.766,61.217 58.812,61.171 58.936,61.171 U1.100 59.445,58.715 59.766,58.394 ; U1.11 57.716,54.909 58.431,54.909 58.624,54.716 58.624,54.144 58.624,54.001 58.826,53.799 60.026,53.799 61.536,53.799 ; 70.185,58.287 70.185,59.087 71.007,59.909 73.174,59.909 U1.75 ; SD1.4 90.38,55.72 90.825,55.275
  Top Layer w0.2: 52.391,66.994 52.65,67.253 v1(52.65,68.4) ; 59.825,74.975 59.825,72.3 60.125,72 P1.1
  Top Layer w0.254: 53.991,49.391 54.191,49.391 54.2,49.4 FB2.1 ; C4.2@60.3,40.51 C4.2 C4.2@60.365,40.425 ; U1.50@71.476,46.15 72.35,46.15
  Top Layer w0.3: v1(53.375,48.775) 53.991,49.391 ; v1(59.7,54.375) 59.796,54.279 59.796,54.029 60.026,53.799 60.657,53.168 60.905,53.168 61.536,53.799 62.116,54.379 62.116,57.744 ; 59.766,58.394 61.891,58.394 62.116,58.169 62.116,57.744 ; 70.185,58.287 69.641,57.744 62.116,57.744 ; v1(86.8,48.8) 86.8,47.7 87.6,46.9 89.1,46.9 90.3,45.7
  Top Layer w0.4: v1(45.65,46.675) 45.606,46.719 38.266,46.719 36.691,48.294 36.691,65.644 38.041,66.994 52.391,66.994 ; v1(51.675,76.125) 58.675,76.125 59.825,74.975 ; v1@52.666,68.384 52.666,65.044 56.206,61.504 57.161,61.504 ; v1(54.4,39.8) 54.4,41.173 C9.1 57.273,41.273 v1(57.3,41.3) ; v1(56.243,57.925) 56.738,57.43 ; J2.6 57.8,79.675 61.1,76.375 61.1,72.04 P1.1 76.8,72 77.173,72.373 R6.1 ; C8.2 C7.2 C6.2 C5.2 C4.2 ; C4.2@60.3,40.51 60.3,41.578 60.626,41.904 C3.1 60.626,44.574 60.3,44.9 ; C4.2@60.365,40.425 v1(61.925,40.425) 61.925,39.675 62.75,38.85 66.95,38.85 68.575,40.475 73.075,40.475 ; D1.2 71.875,37.075 73.05,38.25 73.05,40.45 73.075,40.475 ; 72.35,46.15 73.075,45.425 73.075,40.475 ; R6.1@77.073,72.5 R6.1 ; J3.1 81,81.42 81,77.161 82.5,75.661 R4.1 ; R2.1 87.8,71.4 87.8,71.548 87.621,71.727 R3.1 R4.1 ; C13.1 90.3,43.7 ; 90.3,45.7 90.3,43.7 ; v1(90.825,51.5) 90.825,55.275 ; 73.075,40.475 73.9,40.475 78.75,45.325 U2.4 88.675,45.325 90.3,43.7 ; R6.1 77.2,71.1 77.827,70.473 R5.1 80.648,70.473 80.975,70.8 80.975,71.25 81.425,71.7 82.447,71.7 82.46,71.687 R4.1
  Bottom Layer w0.15: v1(56.243,57.925) 56.225,57.907 56.225,54.7 56.7,54.225 59.287,54.225 59.313,54.251 59.576,54.251 v1(59.7,54.375)
  Bottom Layer w0.254: v1(51.675,76.125) 51.675,74.925 52.65,73.95 v1(52.65,68.4) ; v1(61.925,40.425) v1@61.95,40.4
  Bottom Layer w0.4: v1(45.65,46.675) 45.675,46.675 49.75,50.75 52.7,50.75 53.375,50.075 v1(53.375,48.775) 53.375,40.825 v1(54.4,39.8) ; v1(57.3,41.3) 62.625,41.3 62.9,41.025 62.9,40.65 62.65,40.4 v1@61.95,40.4 ; v1(86.8,48.8) 86.8,49.575 88.725,51.5 v1(90.825,51.5)
+3V3A: C10.1 C11.2 FB2.2 U1.20 U1.21 | length 15.3
  Top Layer w0.15: 56.373,49.5 56.803,49.93 U1.21 ; 56.4,50.275 56.555,50.43 U1.20
  Top Layer w0.254: C10.1@53.675,44.998 C10.1
  Top Layer w0.4: C10.1@53.675,44.998 C11.2 52.449,47.3 52.3,47.449 52.3,49.6 52.975,50.275 55.077,50.275 ; 56.373,49.5 FB2.2 55.2,50.1 55.051,50.249 55.077,50.275 ; 56.4,50.275 55.2,50.275 55.077,50.275
+5: C12.1 FB1.1 U2.3 | length 16.1
  Top Layer w0.4: U2.3 86.2,36.713 85.387,35.9 C12.1 84.627,33.998 86.225,32.4 FB1.1
BOOT_0: R7.2 U1.94 | length 6.9
  Top Layer w0.15: R7.2 60.05,65.1 62.445,62.705 U1.94
DEBUG_JRST: J3.3 U1.90 | length 46.6
  Top Layer w0.15: U1.90 64.445,63.895 66.3,65.75 v1(66.3,70.2) ; v2(69.9,79.2) 75.2,79.2 76.4,80.4 76.4,84.4 78,86 84.6,86 86.2,84.4 86.2,81.54 J3.3
  Bottom Layer w0.15: v1(66.3,70.2) 66.3,78.6 66.9,79.2 v2(69.9,79.2)
DEBUG_JTDI: J3.5 U1.77 | length 53.7
  Top Layer w0.15: v1(70.7,86.825) 70.7,88.1 71.4,88.8 87.8,88.8 91.24,85.36 J3.5 ; U1.77 70.966,61.701 70.966,62.766 72.2,64 v1(72.2,67.175)
  Bottom Layer w0.15: v1(70.7,86.825) 70.7,86.2 72.2,84.7 v1(72.2,67.175)
DEBUG_LED: D2.2 U1.4 | length 13.7
  Top Layer w0.15: D2.2@46.825,63.8 v1(50.1,63.8) ; v1(56.325,59.3) 56.449,59.176 56.449,58.851 56.87,58.43 U1.4
  Bottom Layer w0.15: v1(50.1,63.8) 52.525,63.8 56.325,60 v1(56.325,59.3)
DEBUG_SWDCLK: J3.6 U1.76 | length 37
  Top Layer w0.15: U1.76 71.445,61.925 71.52,62 71.925,62 75.95,66.025 81.475,66.025 v1(81.5,66) ; J3.6 93.8,81.48 v1(93.8,76.8)
  Bottom Layer w0.15: v1(81.5,66) 84,68.5 84,73.75 85.35,75.1 92.9,75.1 93.8,76 v1(93.8,76.8)
DEBUG_SWDIO: J3.7 U1.72 | length 41.7
  Top Layer w0.15: v1(71.754,58.07) 71.842,58.07 72.202,58.43 U1.72 ; v1(77.3,63.6) 82.805,63.6 83.02,63.385 v1(83.115,63.385) ; J3.7 96.32,76.975 96.4,76.895 v1(96.4,76.8)
  Bottom Layer w0.15: v1(71.754,58.07) 71.754,58.45 71.75,58.454 71.75,60.65 74.7,63.6 v1(77.3,63.6) ; v1(83.115,63.385) 83.23,63.5 85.2,63.5 96.4,74.7 v1(96.4,76.8)
DEBUG_SWO: J3.4 U1.89 | length 41.5
  Top Layer w0.15: U1.89 64.945,62.745 67.3,65.1 67.3,67.5 69.05,69.25 74.15,69.25 75.338,70.438 75.338,70.562 75.337,71.062 v1(75.375,71.1) ; J3.4 v1(88.7,83.7)
  Bottom Layer w0.15: v1(75.375,71.1) 75.3,71.175 75.3,77.863 81.137,83.7 v1(88.7,83.7)
GND: C1.2 C2.2 C3.2 C4.1 C5.1 C6.1 C7.1 C8.1 C9.2 C10.2 C11.1 C12.2 C13.2 C14.2 C15.2 C16.2 C17.2 C18.1 J1.A1 J1.A12 J2.5 J3.8 J4.2 P1.3 R1.2 R8.2 SD1.6 U1.10 U1.19 U1.26 U1.49 U1.74 U1.99 U2.1 | length 323.6
  Top Layer w0.127: 56.1,56.275 56.945,55.43 U1.10 59.755,55.43 ; 56.205,50.93 U1.19 58.47,50.93 58.774,50.626 ; U1.26@59.4,46.225 U1.26 ; 59.933,62.767 59.945,62.755 ; U1.99 59.945,60.756 60.222,60.479 ; v1@60.05,56.65 v1(60.075,56.675) ; v1@60.596,60.479 v1(60.7,60.375) ; U1.49 70.945,45.255 71.3,44.9 ; 71.205,59.43 U1.74 74.18,59.43 74.55,59.8
  Top Layer w0.15: 59.445,45.15 U1.26 ; 59.933,62.767 59.933,63.468 ; U1.99 59.945,62.755 ; U1.49 70.945,47.66 ; 95.15,30.4 95.575,30.825 95.575,32.075 96.2,32.7 J1.A1
  Top Layer w0.2: U1.26@59.4,46.225 59.4,47.625 60.075,48.3 ; 96.131,38.731 J1.A12@96.775,38.731
  Top Layer w0.254: C17.2@44.973,57.9 C17.2 ; C10.2@54.95,44.823 C10.2 ; C11.1@55.027,47.202 C11.1 C11.1@55.157,47.268 ; C1.2@71.3,44.006 C1.2 ; C2.2@75.688,59.8 C2.2 C2.2@75.888,60 ; v1(85.4,58) 89.55,58 SD1.6 ; C13.2@90.1,38.6 90.2,38.7 C13.2 ; v1(94.3,37.5) v1@94.323,37.523
  Top Layer w0.3: C18.1@53.7,51.99 53.7,51.106 53.876,50.93 56.205,50.93 ; 59.755,55.43 60.05,55.725 v1@60.05,56.65 ; 60.075,48.3 70.175,48.3 ; 70.239,48.311 70.664,48.311 ; 70.945,47.66 70.95,47.665 70.95,48.025 70.664,48.311 ; 71.205,59.43 70.664,58.889 70.664,58.592 70.739,58.517 70.739,58.058 70.664,57.983 70.664,48.311 ; 94.923,37.523 96.131,38.731
  Top Layer w0.4: C15.2 38.5,58.95 39.25,59.7 41.1,59.7 ; R8.2 41.1,59.7 ; C17.2@44.973,57.9 42.9,57.9 41.1,59.7 ; C17.2 46.852,57.873 47.75,56.975 ; v1(47.675,55.95) 47.675,56.9 47.75,56.975 ; v1(48.225,53.25) 48.3,53.25 48.35,53.2 49.9,53.2 51.1,52 C18.1 C18.1@53.7,51.99 ; C9.2 54.3,43.463 54.95,44.113 C10.2@54.95,44.823 ; C16.2@54.673,58.15 52.45,58.15 ; C10.2 C11.1@55.027,47.202 ; C11.1@55.157,47.268 55.157,47.218 55.4,46.975 56.2,46.975 58.025,45.15 58.774,45.15 ; 56.1,56.275 54.754,56.275 C14.2 53.171,56.329 52.625,56.875 52.625,57.975 52.45,58.15 ; 58.774,50.626 58.774,45.15 ; 59.445,45.15 58.774,45.15 ; J2.5 59.8,83.3 58.3,84.8 46.6,84.8 45.1,83.3 45.1,78.3 46.6,76.8 48.9,76.8 50.07,75.63 J4.2 P1.3 56.06,67.34 59.933,63.468 ; 60.222,60.479 v1@60.596,60.479 ; R1.2 60.85,30.1 59.31,31.64 C8.1 C7.1 C6.1 C5.1 C4.1 59.31,41.473 58.774,42.009 C3.2 58.774,45.15 ; C1.2@71.3,44.006 71.3,44.9 ; 74.55,59.8 C2.2@75.688,59.8 ; C2.2@75.888,60 v1(80.5,60) ; C12.2 82.613,35.9 81.6,36.913 U2.1 81.6,41.066 81.834,41.3 86.875,41.3 88.084,40.091 88.084,39.091 88.575,38.6 C13.2@90.1,38.6 ; v1(85.4,58) 84.775,57.375 84.775,55.825 v1(85.6,55) ; v1(87.6,34.6) 87.6,35.4 88.3,36.1 89.75,36.1 90.3,36.65 C13.2 92.7,38.6 93.8,37.5 v1(94.3,37.5) ; v1(90.5,30.4) 95.15,30.4 ; v1@94.323,37.523 94.923,37.523 ; 47.75,56.975 51.275,56.975 52.45,58.15
  Top Layer w0.44: v1(91.825,73.2) 97.375,73.2 98.86,74.685 J3.8
  Bottom Layer w0.254: v1(80.5,60) 82.5,58 83.95,58 ; v1(85.4,58) 83.95,58 ; v1(91.825,73.2) 91.721,73.096 91.346,73.096 82.219,63.969 82.219,61.777 83.95,60.046 83.95,58
  Bottom Layer w0.4: v1(47.675,55.95) 47.625,55.9 47.625,53.85 v1(48.225,53.25) ; v1(60.075,56.675) 60.075,59.95 60.371,60.246 60.571,60.246 v1(60.7,60.375) ; v1(85.6,55) 85.6,53.35 81.8,49.55 80.05,49.55 76.9,46.4 76.9,33.2 79.1,31 86.3,31 87.6,32.3 v1(87.6,34.6) ; v1(90.5,30.4) 90.5,30.422 90.1,30.822 90.1,34.3 91.7,35.9 93.7,35.9 94.3,36.5 v1(94.3,37.5)
HSE_IN: C14.1 U1.12 Y1.1 | length 14.9
  Top Layer w0.15: Y1.1 43.325,55.475 46.05,55.475 46.85,54.675 C14.1 56.45,54.675 56.695,54.43 U1.12 U1.12@57.683,54.442
HSE_OUT: C15.1 U1.13 Y1.2 | length 22.5
  Top Layer w0.15: C15.1 38.5,51.9 38.931,51.469 39.004,51.469 41.473,49 Y1.2 45.3,49 v1(48.35,52.05) ; v1(55.35,53.25) 55.404,53.304 55.879,53.304 56.505,53.93 U1.13
  Bottom Layer w0.15: v1(48.35,52.05) 51.6,52.05 52.8,53.25 v1(55.35,53.25)
I2C1_SCL: J2.8 U1.92 | length 29.8
  Top Layer w0.15: v1(53.8,79.525) J2.8 ; U1.92 63.445,62.87 63.825,63.25 63.825,64.525 65,65.7 v1(65,70)
  Bottom Layer w0.15: v1(53.8,79.525) 53.867,79.458 53.867,79.233 54.6,78.5 62.3,78.5 65,75.8 v1(65,70)
I2C1_SDA: J2.7 U1.93 | length 45.1
  Top Layer w0.15: v1(55.6,83.775) 55.6,81.9 J2.7 ; v1(62.9,66.1) 62.945,66.055 U1.93
  Bottom Layer w0.15: v1(55.6,83.775) 47.875,83.775 46.8,82.7 46.8,79.9 49.1,77.6 52.6,77.6 53.3,76.9 53.3,70.2 54.3,69.2 61,69.2 62.9,67.3 v1(62.9,66.1)
LSE_IN: C16.1 U1.8 Y2.1 | length 14.3
  Top Layer w0.15: Y2.1 52.234,59.925 52.759,59.4 54.673,59.4 C16.1 54.7,60.031 55.078,60.409 58.431,60.409 58.624,60.216 58.624,56.546 58.508,56.43 U1.8
LSE_OUT: C17.1 U1.9 Y2.2 | length 26.5
  Top Layer w0.15: C17.1 45.025,59.152 45.025,60.575 45.263,60.813 58.599,60.813 58.874,60.538 59.028,60.384 59.028,56.476 59.025,56.473 59.025,56.364 58.591,55.93 U1.9 ; C17.1@45.027,59.127 47.04,59.127 47.667,58.5 49.975,58.5 Y2.2
NetD1_1: D1.1 R1.1 | length 8.1
  Top Layer w0.15: R1.1 67.025,30.1 68.575,31.65 D1.1
NetD2_1: D2.1 R8.1 | length 2.6
  Top Layer w0.15: R8.1 D2.1@45.175,63.8
NetP1_2: P1.2 R7.1 | length 4.4
  Top Layer w0.15: R7.1 58.6,67.65 P1.2
NRST: C18.2 J4.1 U1.14 | length 36.3
  Top Layer w0.15: v1(41.4,72) J4.1 ; v1(51.775,53.625) 53.325,53.625 54.453,52.497 54.453,52.237 C18.2 55.368,52 56.798,53.43 U1.14
  Bottom Layer w0.15: v1(41.4,72) 41.276,71.876 41.276,71.613 41.25,71.587 41.25,65.575 51.775,55.05 v1(51.775,53.625)
SDMMC1_CLK: SD1.5 U1.80 | length 38.4
  Top Layer w0.15: v1@69.208,60.067 v1(69.3,59.975) 69.3,60.55 69.45,60.7 69.45,61.633 69.424,61.659 U1.80 ; v1(69.3,50.9) v1(69.3,56.94) ; v1(86.575,56.775) 86.62,56.82 SD1.5
  Bottom Layer w0.15: v1(69.3,50.9) 69.3,50.275 72.575,47 73.925,47 78.35,51.425 80.425,51.425 82.8,53.8 82.8,55.6 84,56.8 86.55,56.8 v1(86.575,56.775) ; v1(69.3,56.94) v1(69.3,59.975)
SDMMC1_CMD: R4.2 SD1.3 U1.83 | length 65.8
  Top Layer w0.15: U1.83 67.945,64.295 71.9,68.25 80.881,68.25 82.5,69.869 R4.2 83.277,70.473 83.575,70.175 83.575,69.05 81.8,67.275 v1(75.325,67.275) ; v1(77.55,53.525) 77.55,52.525 79.125,50.95 85.925,50.95 86.475,51.5 86.475,55.125 86.825,55.475 88.2,55.475 88.943,54.732 89.518,54.732 SD1.3
  Bottom Layer w0.15: v1(75.325,67.275) 75.325,66.55 76.4,65.475 77.8,65.475 78.575,64.7 78.575,62 77.55,60.975 v1(77.55,53.525)
SDMMC1_D0: R5.2 SD1.7 U1.65 | length 63.9
  Top Layer w0.15: v1(69.15,76.9) 77.875,76.9 79.5,75.275 R5.2 ; v1(71.754,54.025) 71.878,54.149 71.878,54.403 72.405,54.93 U1.65 79.403,54.93 83.473,59 89.61,59 SD1.7
  Bottom Layer w0.15: v1(69.15,76.9) 68.974,76.9 68.782,76.708 68.758,76.708 68.5,76.45 68.5,69.625 66.225,67.35 66.225,54.875 67.075,54.025 v1(71.754,54.025)
SDMMC1_D1: R6.2 SD1.8 U1.66 | length 54.1
  Top Layer w0.15: v1(69.55,75.65) 76.55,75.65 77.2,75 R6.2 ; v1(71.754,55.475) 71.799,55.43 78.705,55.43 83.375,60.1 89.61,60.1 SD1.8
  Bottom Layer w0.15: v1(69.55,75.65) 69.55,66.8 67.6,64.85 67.6,55.9 68.1,55.4 71.679,55.4 v1(71.754,55.475)
SDMMC1_D2: R2.2 SD1.1 U1.78 | length 73.9
  Top Layer w0.15: U1.78 70.445,65.12 v1(70.45,65.125) ; v1(70.45,78.05) 79.075,78.05 v1(79.1,78.075) ; v1(87.95,76.15) 87.95,74.15 90.25,71.85 90.25,70.9 89.6,70.25 87.904,70.25 R2.2 87.85,70.196 87.85,67.2 89.15,65.9 v1(92.3,65.9) ; SD1.1 89.63,51.145 90.9,49.875 v1(92.625,49.875)
  Bottom Layer w0.15: v1(70.45,65.125) v1(70.45,78.05) ; v1(79.1,78.075) 86.675,78.075 87.95,76.8 v1(87.95,76.15) ; v1(92.3,65.9) 92.325,65.925 92.775,65.925 93.425,65.275 93.425,50.675 v1(92.625,49.875)
SDMMC1_D3: R3.2 SD1.2 U1.79 | length 45.3
  Top Layer w0.15: U1.79 69.945,60.655 70.1,60.5 73.05,60.5 74.55,62 74.55,62.675 76.875,65 82.425,65 85.275,67.85 85.275,70.448 R3.2 85.883,70.473 86.019,70.337 86.019,63.294 85.25,62.525 v1(84.45,62.525) ; v1(87.325,54.725) 87.325,53.825 87.63,53.52 SD1.2
  Bottom Layer w0.15: v1(84.45,62.525) 84.45,62.1 85.1,61.45 86.35,61.45 87.35,60.45 87.35,54.75 v1(87.325,54.725)
SPI2_CS: J2.1 U1.34 | length 37.4
  Top Layer w0.15: v1(63.4,47.475) 63.445,47.43 U1.34 ; v1(67.45,78.025) 67.45,78.201 67.631,78.382 67.631,78.428 67.8,78.597 J2.1
  Bottom Layer w0.15: v1(63.4,47.475) 63.4,60.2 63.7,60.5 63.7,66 67.475,69.775 67.475,78 v1(67.45,78.025)
SPI2_MISO: J2.3 U1.17 | length 114.7
  Top Layer w0.15: U1.17 59.17,51.93 59.808,51.292 59.808,50.942 v1(59.925,50.825) ; J2.3 v1(63.8,87.1)
  Bottom Layer w0.15: v1(59.925,50.825) 59.925,47.725 56.1,43.9 56.1,38 54.9,36.8 43.6,36.8 39.7,40.7 39.7,58.2 38.6,59.3 38.6,85.6 42.3,89.3 62.4,89.3 63.8,87.9 v1(63.8,87.1)
SPI2_MOSI: J2.2 U1.16 | length 72.9
  Top Layer w0.15: U1.16 65.77,52.43 v1(65.8,52.4) ; v1(65.775,87.275) 65.8,87.25 J2.2
  Bottom Layer w0.15: v1(65.775,87.275) 65.775,87.975 66.1,88.3 71.5,88.3 73.5,86.3 73.5,71.5 79.5,65.5 79.5,53.1 78.6,52.2 71.9,52.2 71.7,52.4 v1(65.8,52.4)
SPI2_SCK: J2.4 U1.68 | length 47.7
  Top Layer w0.15: v1(61.775,83.8) 61.8,83.775 J2.4 ; v1(71.754,56.85) 71.754,56.77 72.094,56.43 U1.68
  Bottom Layer w0.15: v1(61.775,83.8) 61.775,84.675 62.4,85.3 69.6,85.3 71.4,83.5 71.4,64.15 70.75,63.5 69.8,63.5 68.275,61.975 68.275,57.425 68.579,57.121 68.579,57.059 68.579,57.048 ccw(c69.3,56.94) 70.011,56.777 70.04,56.806 70.084,56.85 v1(71.754,56.85)
VBUS: FB1.2 J1.A4 | length 3.5
  Top Layer w0.127: 96.1,34.2 J1.A4
  Top Layer w0.4: FB1.2 95.3,33.4 96.1,34.2
VCAP_1: C1.1 U1.48 | length 2.5
  Top Layer w0.15: C1.1 C1.1@70,43.906 ; 70,44.9 70.445,45.345 U1.48
  Top Layer w0.4: C1.1@70,43.906 70,44.9
VCAP_2: C2.1 U1.73 | length 2.7
  Top Layer w0.15: U1.73 74.22,58.93 74.65,58.5 ; C2.1@75.6,58.5 C2.1
  Top Layer w0.4: 74.65,58.5 C2.1@75.6,58.5
pads on no net: J1.A2 J1.A3 J1.A5 J1.A6 J1.A7 J1.A8 J1.A9 J1.A10 J1.A11 J1.B1 J1.B2 J1.B3 J1.B4 J1.B5 J1.B6 J1.B7 J1.B8 J1.B9 J1.B10 J1.B11 J1.B12 J1.S1 J1.S2 J1.S3 J1.S4 J2.9 J2.10 J3.2 SD1.9 SD1.10 SD1.11 SD1.12 SD1.13 SD1.14 U1.1 U1.2 U1.3 U1.5 U1.7 U1.15 U1.18 U1.22 U1.23 U1.24 U1.25 U1.28 U1.29 U1.30 U1.31 U1.32 U1.33 U1.35 U1.36 U1.37 U1.38 U1.39 U1.40 U1.41 U1.42 U1.43 U1.44 U1.45 U1.46 U1.47 U1.51 U1.52 U1.53 U1.54 U1.55 U1.56 U1.57 U1.58 U1.59 U1.60 U1.61 U1.62 U1.63 U1.64 U1.67 U1.69 U1.70 U1.71 U1.81 U1.82 U1.84 U1.85 U1.86 U1.87 U1.88 U1.91 U1.95 U1.96 U1.97 U1.98 U2.2

## Silkscreen, mask and mechanical layers (free items; w line width, h text height)
Top Overlay:
  text "CAMERA CONNECTOR" at 41.156,86 h1.2
  text "DEBUG CONNECTOR" at 84.981,84.6 h1.2
  text "SD CARD" at 94.103,62.775 h1.2
  text "STM32 MCU BOARD" at 37.656,31.175 h1.2
  text "USB" at 98.501,28.425 h1.2

## Text inside footprints (layer, text, board x,y; h text height)
J2: Top Overlay "1" at 67.775,83.825 h1.02; Top Overlay "10" at 49,83.725 h1.02